# EAGLE board Sch (EAGLE 7.5.0)
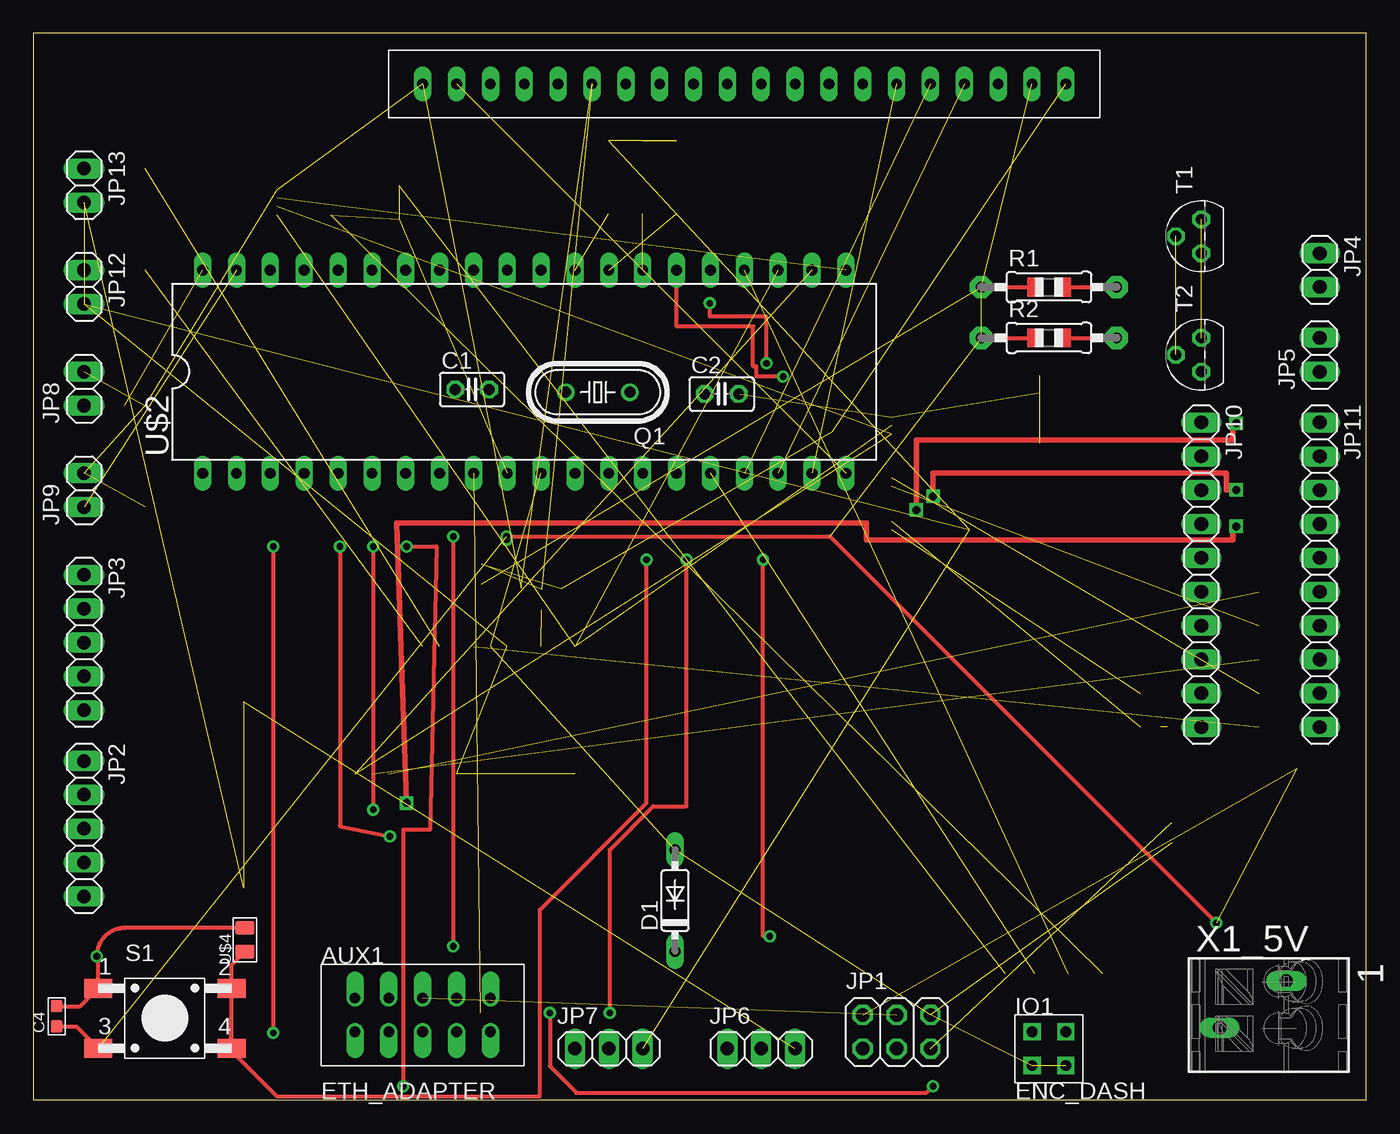
[diagram p0: board, top side]
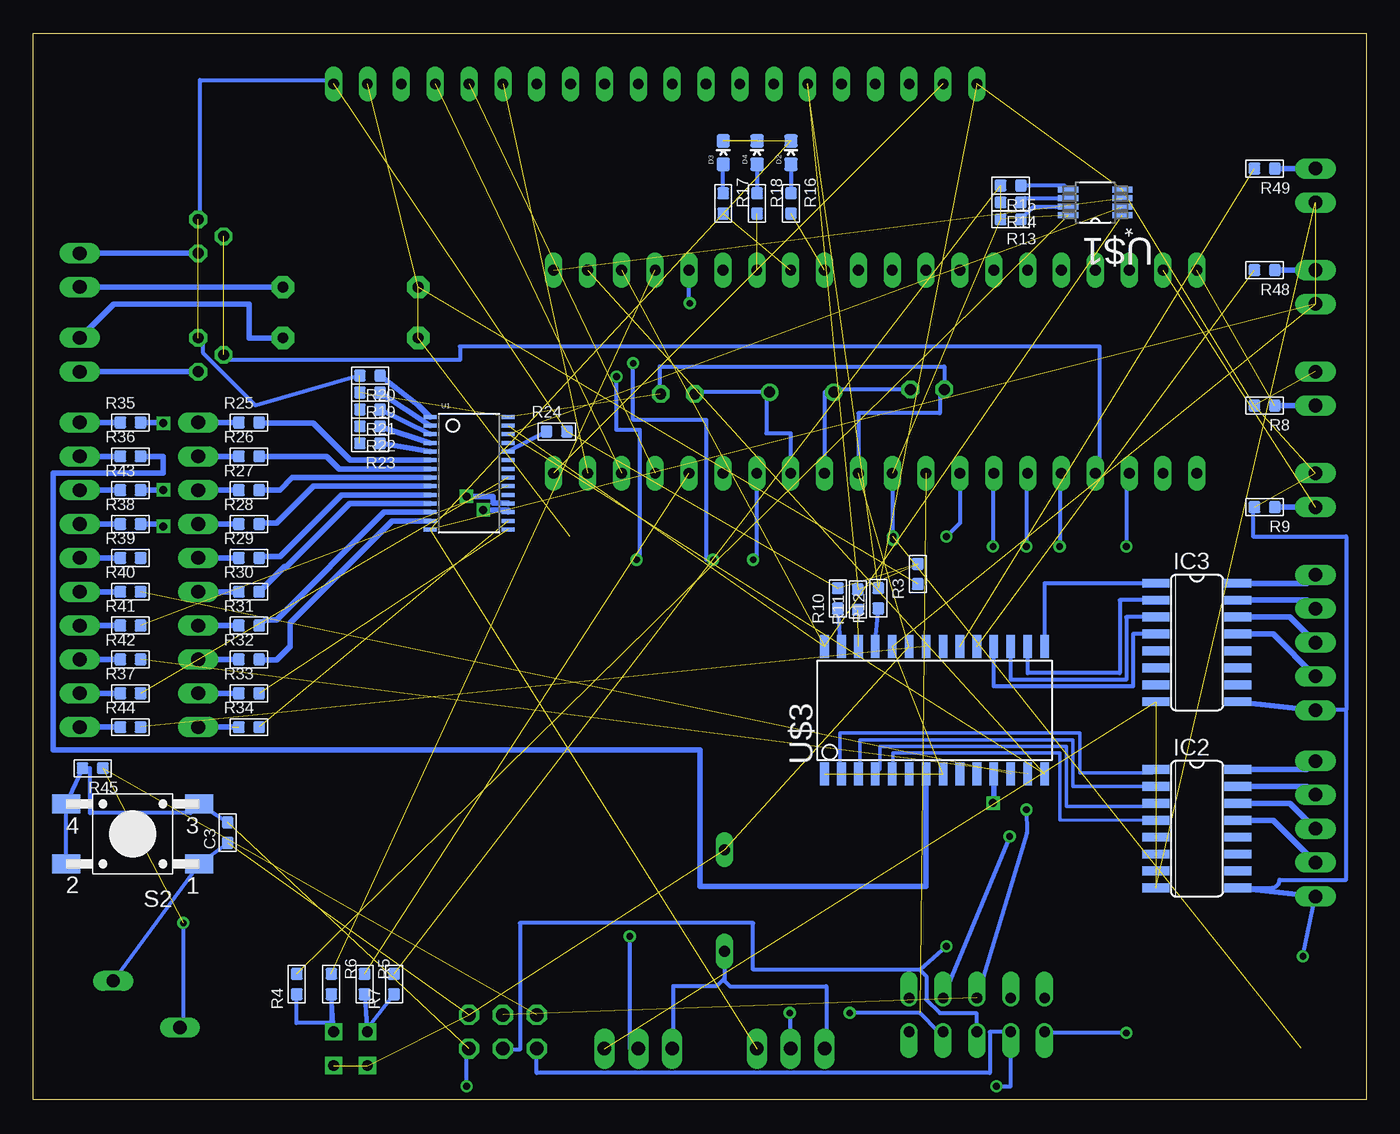
[diagram p1: board, bottom side, seen from below]

Size 100 x 80 mm. Coordinates in mm from the lower left corner, seen from the top.
Outline: 0,0 100,0 100,80 0,80 0,0
Copper layers (1*16): Top 0.035mm / dielectric 1.5mm / Bottom 0.035mm
Design rules "default": minimum track width 10mil, minimum drill 24mil, track to track 8mil, track to pad 8mil, pad to pad 8mil, via to via 8mil, smd to smd 8mil, copper to edge 40mil, drill to drill 8mil, minimum pad ring 10mil, minimum via ring 8mil, stop-mask expansion 4mil, vias tented up to drill 0mil, thermal gap 10mil

## Footprints (pad centres in the part's own frame; a part is rotated, then mirrored left to right if it is on the bottom)
PINHEAD5X5 = drill 0.8 offset: 1 -5.08,0; 2 -2.54,0; 3 0,0; 4 2.54,0; 5 5.08,0; 6 -5.08,-2.54; 7 -2.54,-2.54; 8 0,-2.54; 9 2.54,-2.54; 10 5.08,-2.54
C025-025X050 = drill 0.813 octagon: 1 -1.27,0; 2 1.27,0
C0603 = smd 0.889 x 0.889: 1 0,0.762; 2 0,-0.762
DO35-7 = drill 0.813 long: A 3.81,0; C -3.81,0
LED-0603 = smd 1 x 1: A 0,-0.877; C 0,0.877
SO16 = smd 0.66 x 2.032: 1 -4.445,-3.073; 2 -3.175,-3.073; 3 -1.905,-3.073; 4 -0.635,-3.073; 5 0.635,-3.073; 6 1.905,-3.073; 7 3.175,-3.073; 8 4.445,-3.073; 9 4.445,3.073; 10 3.175,3.073; 11 1.905,3.073; 12 0.635,3.073; 13 -0.635,3.073; 14 -1.905,3.073; 15 -3.175,3.073; 16 -4.445,3.073
PINHEAD2X2 = drill 0.8 square: P$1 -2.54,0; P$2 0,0; P$3 0,-2.54; P$4 -2.54,-2.54
2X03 = drill 1.016 octagon: 1 -2.54,-1.27; 2 -2.54,1.27; 3 0,-1.27; 4 0,1.27; 5 2.54,-1.27; 6 2.54,1.27
1X05 = drill 1.016 long: 1 -5.08,0; 2 -2.54,0; 3 0,0; 4 2.54,0; 5 5.08,0
1X02 = drill 1.016 long: 1 -1.27,0; 2 1.27,0
1X03 = drill 1.016 long: 1 -2.54,0; 2 0,0; 3 2.54,0
1X10 = drill 1.016 long: 1 -11.43,0; 2 -8.89,0; 3 -6.35,0; 4 -3.81,0; 5 -1.27,0; 6 1.27,0; 7 3.81,0; 8 6.35,0; 9 8.89,0; 10 11.43,0
PINHEAD1X20 = drill 0.8 long: P$1 25.4,0; P$2 22.86,0; P$3 20.32,0; P$4 17.78,0; P$5 15.24,0; P$6 12.7,0; P$7 10.16,0; P$8 7.62,0; P$9 5.08,0; P$10 2.54,0; P$11 0,0; P$12 -2.54,0; P$13 -5.08,0; P$14 -7.62,0; P$15 -10.16,0; P$16 -12.7,0; P$17 -15.24,0; P$18 -17.78,0; P$19 -20.32,0; P$20 -22.86,0
HC49/S = drill 0.813: 1 -2.413,0; 2 2.413,0
0805-THM = drill 0.813 pad 1.676 octagon: 1 -5.08,0; 2 5.08,0
R0603 = smd 0.889 x 0.889: 1 0,0.762; 2 0,-0.762
TASTER-9314_SMD = smd 2.1 x 1.4: 1 -5,2.25; 2 5,2.25; 3 -5,-2.25; 4 5,-2.25
TO92 = drill 0.813 octagon: 1 1.27,0; 2 0,1.905; 3 -1.27,0
TSSOP28 = smd 0.305 x 0.991: 1 -4.225,-2.918; 2 -3.575,-2.918; 3 -2.925,-2.918; 4 -2.275,-2.918; 5 -1.625,-2.918; 6 -0.975,-2.918; 7 -0.325,-2.918; 8 0.325,-2.918; 9 0.975,-2.918; 10 1.625,-2.918; 11 2.275,-2.918; 12 2.925,-2.918; 13 3.575,-2.918; 14 4.225,-2.918; 15 4.225,2.918; 16 3.575,2.918; 17 2.925,2.918; 18 2.275,2.918; 19 1.625,2.918; 20 0.975,2.918; 21 0.325,2.918; 22 -0.325,2.918; 23 -0.975,2.918; 24 -1.625,2.918; 25 -2.275,2.918; 26 -2.925,2.918; 27 -3.575,2.918; 28 -4.225,2.918
SOP65P490X110-8N = smd 1.524 x 0.457: 1 -2.032,0.965; 2 -2.032,0.33; 3 -2.032,-0.33; 4 -2.032,-0.965; 5 2.032,-0.965; 6 2.032,-0.33; 7 2.032,0.33; 8 2.032,0.965
DIL40 = drill 0.813 long: 1 -24.13,-7.62; 2 -21.59,-7.62; 3 -19.05,-7.62; 4 -16.51,-7.62; 5 -13.97,-7.62; 6 -11.43,-7.62; 7 -8.89,-7.62; 8 -6.35,-7.62; 9 -3.81,-7.62; 10 -1.27,-7.62; 11 1.27,-7.62; 12 3.81,-7.62; 13 6.35,-7.62; 14 8.89,-7.62; 15 11.43,-7.62; 16 13.97,-7.62; 17 16.51,-7.62; 18 19.05,-7.62; 19 21.59,-7.62; 20 24.13,-7.62; 21 24.13,7.62; 22 21.59,7.62; 23 19.05,7.62; 24 16.51,7.62; 25 13.97,7.62; 26 11.43,7.62; 27 8.89,7.62; 28 6.35,7.62; 29 3.81,7.62; 30 1.27,7.62; 31 -1.27,7.62; 32 -3.81,7.62; 33 -6.35,7.62; 34 -8.89,7.62; 35 -11.43,7.62; 36 -13.97,7.62; 37 -16.51,7.62; 38 -19.05,7.62; 39 -21.59,7.62; 40 -24.13,7.62
SO28W = smd 0.65 x 1.7: 1 -8.89,-4.78; 2 -7.62,-4.78; 3 -6.35,-4.78; 4 -5.08,-4.78; 5 -3.81,-4.78; 6 -2.54,-4.78; 7 -1.27,-4.78; 8 0,-4.78; 9 1.27,-4.78; 10 2.54,-4.78; 11 3.81,-4.78; 12 5.08,-4.78; 13 6.35,-4.78; 14 7.62,-4.78; 15 7.62,4.78; 16 6.35,4.78; 17 5.08,4.78; 18 3.81,4.78; 19 2.54,4.78; 20 1.27,4.78; 21 0,4.78; 22 -1.27,4.78; 23 -2.54,4.78; 24 -3.81,4.78; 25 -5.08,4.78; 26 -6.35,4.78; 27 -7.62,4.78; 28 -8.89,4.78
R0805 = smd 1.397 x 1.016: 1 0,0.889; 2 0,-0.889
P-250-202 = drill 1 long: L1 1.3,2.55; L2 -3.7,-0.95

## Placement (x,y rotation side)
AUX1  ETH_ADAPTER  [PINHEAD5X5]  29.21,7.62 0 top
C1  22pf  [C025-025X050]  32.92,53.28 0 top
C2  22pf  [C025-025X050]  51.65,52.94 0 top
C3  10nf  [C0603]  85.42,20.03 180 bottom
C4  10nf  [C0603]  1.75,6.25 180 top
D1  1N4148DO35-7  [DO35-7]  48.15,14.93 90 top
D2  RED  [LED-0603]  43.16,71.05 0 bottom
D3  GREEN  [LED-0603]  48.24,71.05 0 bottom
D4  ORANGE  [LED-0603]  45.7,71.05 0 bottom
IC2  ULN2003AD  [SO16]  12.7,20.32 270 bottom
IC3  ULN2003AD  [SO16]  12.7,34.29 270 bottom
IO1  ENC_DASH  [PINHEAD2X2]  77.47,5.08 0 top
JP1  ISP  [2X03]  64.77,5.08 0 top
JP2  Stepper1  [1X05]  3.81,20.32 270 top
JP3  Stepper2  [1X05]  3.81,34.29 270 top
JP4  DiscLight1  [1X02]  96.52,62.23 270 top
JP5  Disclight2  [1X02]  96.52,55.88 90 top
JP6  LB1  [1X03]  54.61,3.81 0 top
JP7  LB2  [1X03]  43.18,3.81 0 top
JP8  outsideTemp  [1X02]  3.81,53.34 90 top
JP9  Photocell  [1X02]  3.81,45.72 90 top
JP10  ledbar_power  [1X10]  87.63,39.37 270 top
JP11  ledbar_steering  [1X10]  96.52,39.37 270 top
JP12  indicator_right  [1X02]  3.81,60.96 270 top
JP13  indicator_left  [1X02]  3.81,68.58 270 top
LCD1  LCD12864  [PINHEAD1X20]  52.07,76.2 0 top
Q1  16MHz  [HC49/S]  42.35,53.07 180 top
R1  180  [0805-THM]  76.2,60.96 0 top
R2  180  [0805-THM]  76.2,57.15 0 top
R3  4.7K  [R0603]  33.64,39.43 0 bottom
R4  10K  [R0603]  80.23,8.66 0 bottom
R5  10K  [R0603]  75.15,8.66 180 bottom
R6  10K  [R0603]  77.64,8.67 180 bottom
R7  10K  [R0603]  72.94,8.66 0 bottom
R8  10K  [R0603]  7.62,52.07 90 bottom
R9  10K  [R0603]  7.62,44.45 90 bottom
R10  0R  [R0603]  39.64,37.6 0 bottom
R11  0R  [R0603]  38.14,37.51 0 bottom
R12  0R  [R0603]  36.6,37.61 0 bottom
R13  0R  [R0603]  26.67,66.04 90 bottom
R14  0R  [R0603]  26.67,67.31 90 bottom
R15  0R  [R0603]  26.67,68.58 90 bottom
R16  150R  [R0603]  43.16,67.24 180 bottom
R17  91R  [R0603]  48.24,67.24 180 bottom
R18  160R  [R0603]  45.7,67.24 180 bottom
R19  0R  [R0603]  74.74,53.05 90 bottom
R20  0R  [R0603]  74.74,54.32 90 bottom
R21  0R  [R0603]  74.74,51.78 90 bottom
R22  0R  [R0603]  74.74,50.51 90 bottom
R23  0R  [R0603]  74.74,49.24 90 bottom
R24  0R  [R0603]  60.73,50.13 270 bottom
R25  180R  [R0603]  83.82,50.8 270 bottom
R26  180R  [R0603]  83.82,48.26 270 bottom
R27  180R  [R0603]  83.82,45.72 270 bottom
R28  180R  [R0603]  83.82,43.18 270 bottom
R29  180R  [R0603]  83.82,40.64 270 bottom
R30  180R  [R0603]  83.82,38.1 270 bottom
R31  180R  [R0603]  83.82,35.56 270 bottom
R32  180R  [R0603]  83.82,33.02 270 bottom
R33  180R  [R0603]  83.82,30.48 270 bottom
R34  180R  [R0603]  83.82,27.94 270 bottom
R35  180R  [R0603]  92.71,50.8 270 bottom
R36  180R  [R0603]  92.71,48.26 270 bottom
R37  180R  [R0603]  92.71,30.48 270 bottom
R38  180R  [R0603]  92.71,43.18 270 bottom
R39  180R  [R0603]  92.71,40.64 270 bottom
R40  180R  [R0603]  92.71,38.1 270 bottom
R41  180R  [R0603]  92.71,35.56 270 bottom
R42  180R  [R0603]  92.71,33.02 270 bottom
R43  180R  [R0603]  92.71,45.72 270 bottom
R44  180R  [R0603]  92.71,27.94 270 bottom
R45  10K  [R0603]  95.55,24.86 90 bottom
R48  180R  [R0603]  7.62,62.23 90 bottom
R49  180R  [R0603]  7.62,69.85 90 bottom
S1  menubutton  [TASTER-9314_SMD]  9.87,6.1 0 top
S2  RESET  [TASTER-9314_SMD]  92.54,19.93 180 bottom
T1  BC337  [TO92]  87.63,64.77 90 top
T2  BC337  [TO92]  87.63,55.88 90 top
U1  [TSSOP28]  67.31,46.99 270 bottom
U$1  MCP9808-E/MS  [SOP65P490X110-8N]  20.32,67.31 180 bottom
U$2  ARDUINO_1284P  [DIL40]  36.83,54.61 0 top
U$3  MCP23016  [SO28W]  31.75,29.21 0 bottom
U$4  10K  [R0805]  15.87,11.99 180 top
X1_5V  250-202  [P-250-202]  92.71,6.35 0 top

## Library data of the parts
AUX1 IO1 LCD1 U$2 U$3 = Btz
C1 C2 = rcl
C3 C4 = Seeed-Capacitor-2016; MPN: CC0603KRX7R9BB103
D1 = diode
D2-D4 = SparkFun-LED; PROD_ID: DIO-00819
IC2 IC3 = uln-udn
JP1-JP13 = pinhead
Q1 = crystal; OC_FARNELL: 1667008; OC_NEWARK: unknown
R1 R2 U1 = adafruit
R3 = Seeed-Resistor-2016; MPN: RC0603JR-074K7L
R4-R9 R45 = Seeed-Resistor-2016; MPN: RC0603FR-0710KL
R10-R44 = Seeed-Resistor-2016; MPN: RC0603JR-070RL
R48 R49 = Seeed-Resistor-2016; MPN: RC0603JR-07100RL
S1 S2 = Ergaenzung
T1 T2 = transistor
U$1 = mcp9808; MPN: MCP9808-E/MS; OC_FARNELL: 2080523; OC_NEWARK: 89T8871; PACKAGE: MSOP-8; SUPPLIER: MICROCHIP
U$4 = Seeed-Resistor-2016; MPN: RC0805FR-0710KL
X1_5V = con-wago_250

## Nets
AVCC: U$2.30
DISCLIGHT1: T1.2 T2.2 U$2.4
GND: U$2.31
N$1: IC2.16 JP2.1
N$2: IC2.15 JP2.2
N$3: IC2.14 JP2.3
N$4: IC2.13 JP2.4
N$5: IC3.16 JP3.1
N$6: IC3.15 JP3.2
N$7: IC3.14 JP3.3
N$8: IC3.13 JP3.4
N$10: R36.1 U$3.7
N$11: JP5.1 T2.3
N$12: JP5.2 R2.2
N$13: JP4.2 R1.2
N$14: JP4.1 T1.3
N$15: S1.2 S1.4 U$2.14 U$4.1
N$16: IC3.1 U$3.15
N$17: C2.1 Q1.1 U$2.13
N$18: IC3.2 U$3.16
N$19: C1.2 Q1.2 U$2.12
N$20: IC3.3 U$3.17
N$21: D1.C JP6.1 JP7.1
N$22: R11.2 U$3.26
N$23: AUX1.7 JP1.1 U$2.7
N$24: AUX1.8 JP1.3 U$2.8
N$25: IC3.4 U$3.18
N$26: AUX1.3 JP1.4 U$2.6
N$27: R38.1 U$3.11
N$28: U$1.3 U$2.21
N$29: IO1.P$2 R4.2 R6.1
N$30: AUX1.6 U$2.3
N$31: AUX1.4 U$2.5
N$32: U1.26 U$1.2 U$2.22 U$3.14
N$33: U1.27 U$1.1 U$2.23 U$3.28
N$34: IO1.P$1 R5.1 R7.2
N$35: IC2.1 U$3.2
N$36: IC2.2 U$3.3
N$37: LCD1.P$4 U$2.18
N$38: LCD1.P$5 U$2.17
N$39: LCD1.P$6 U$2.19
N$40: LCD1.P$19 U$2.20
N$41: R5.2 U$2.16
N$42: R6.2 U$2.24
N$43: IC2.3 U$3.4
N$44: IC2.4 U$3.5
N$45: R14.2 U$1.6
N$46: JP7.2 U$2.25
N$47: JP6.2 U$2.26
N$48: JP8.1 R8.2 U$2.40
N$49: R10.2 U$3.27
N$50: JP9.1 R9.2 U$2.39
N$51: R41.1 U1.20
N$52: R12.2 U$3.25
N$53: R13.2 U$1.7
N$54: R15.2 U$1.5
N$55: U1.19
N$56: D2.A R16.2
N$57: D3.A R17.2
N$58: D4.A R18.2
N$59: R18.1 U$2.27
N$60: R17.1 U$2.28
N$61: R16.1 U$2.29
N$62: R24.2 U1.24
N$63: R23.2 U1.5
N$64: R22.2 U1.4
N$65: R21.2 U1.3
N$66: R19.2 U1.2
N$67: R20.2 U1.1
N$68: JP10.1 R25.2
N$69: JP10.2 R26.2
N$70: JP10.3 R27.2
N$71: JP10.4 R28.2
N$72: JP10.5 R29.2
N$73: JP10.6 R30.2
N$74: JP10.7 R31.2
N$75: JP10.8 R32.2
N$76: JP10.9 R33.2
N$77: JP10.10 R34.2
N$78: JP11.1 R35.2
N$79: JP11.2 R36.2
N$80: JP11.3 R43.2
N$81: JP11.4 R38.2
N$82: JP11.5 R39.2
N$83: JP11.6 R40.2
N$84: JP11.7 R41.2
N$85: JP11.8 R42.2
N$86: JP11.9 R37.2
N$87: JP11.10 R44.2
N$88: R25.1 U1.6
N$89: R26.1 U1.7
N$90: R27.1 U1.8
N$91: R28.1 U1.9
N$92: R29.1 U1.10
N$93: R30.1 U1.11
N$94: R31.1 U1.12
N$95: R32.1 U1.13
N$96: R33.1 U1.15
N$97: R34.1 U1.16
N$98: R35.1 U1.17
N$99: R43.1 U1.18
N$102: R37.1 U1.21
N$103: R40.1 U$3.12
N$104: C4.1 JP1.2 LCD1.P$2 R1.1 R2.1 R3.2 R4.1 R7.1 R13.1 R14.1 R15.1 R45.2 S1.3 U$1.8 U$2.10 X1_5V.L2
N$105: AUX1.9 C3.2 JP1.5 R45.1 S2.2 S2.3 S2.4 U$2.9
N$106: R42.1 U$3.13
N$107: R44.1 U$3.22
N$108: R48.1 U$3.19
N$109: R49.1 U$3.20
N$110: JP12.1 R48.2
N$111: JP13.1 R49.2
N$112: D2.C D3.C D4.C IC2.8 IC3.8 JP6.3 JP7.3 JP12.2 JP13.2 U1.14 U$3.1 U$3.8 U$3.24
P$3_GND: C1.1 C2.2 C3.1 C4.2 D1.A IC2.9 IC3.9 IO1.P$3 IO1.P$4 JP1.6 JP2.5 JP3.5 JP8.2 JP9.2 LCD1.P$1 LCD1.P$15 LCD1.P$20 R3.1 R8.1 R9.1 R10.1 R11.1 R12.1 R19.1 R20.1 R21.1 R22.1 R23.1 R24.1 S1.1 S2.1 T1.1 T2.1 U1.28 U$1.4 U$2.11 U$3.23 U$4.2 X1_5V.L1
VCC: AUX1.5

## Tracks (layer width: path | path; a pad name or v marks a point on that pad's centre or on a via)
DISCLIGHT1  (1 unrouted)
  Bottom 0.305: U$2.4 20,46.99 20,56.5 68,56.5 68,55.5 85.72,55.5 T2.2
N$1
  Bottom 0.406: JP2.1 4.45,24.77 IC2.16
N$2
  Bottom 0.406: JP2.2 4.45,23.5 IC2.15
N$3
  Bottom 0.406: JP2.3 5.71,22.23 IC2.14
N$4
  Bottom 0.406: JP2.4 6.99,20.95 IC2.13
N$5
  Bottom 0.406: JP3.1 4.45,38.73 IC3.16
N$6
  Bottom 0.406: JP3.2 4.45,37.47 IC3.15
N$7
  Bottom 0.406: JP3.3 5.71,36.2 IC3.14
N$8
  Bottom 0.406: JP3.4 6.99,34.92 IC3.13
N$10
  Bottom 0.406: R36.1 90.25,48.26 90.25,47 98.5,47 98.5,26.25 50,26.25 50,16 33.02,16 U$3.7
N$11
  Bottom 0.406: T2.3 JP5.1
N$12
  Bottom 0.406: JP5.2 93.98,59.69 83.82,59.69 83.82,57.15 R2.2
N$13
  Bottom 0.406: JP4.2 R1.2
N$14
  Bottom 0.406: JP4.1 T1.3
N$15  (via drill 0.5)
  Top 0.305: S1.4 S1.2 | S1.2 14.87,10.1 U$4.1 | S1.2 14.75,3.75 18.25,0.25 38,0.25 38,14.25 46,22.25 v46,40.5
  Bottom 0.305: v46,40.5 45.72,40.78 U$2.14
N$16
  Bottom 0.305: IC3.1 24.13,38.73 U$3.15
N$17
  Bottom 0.305: C2.1 50.38,53.07 Q1.1 45,53.07 45,50 43.18,50 U$2.13
N$18
  Bottom 0.305: IC3.2 18.5,37.47 18.5,32 25.4,32 U$3.16
N$19
  Bottom 0.305: C1.2 39.94,53.28 Q1.2 40.64,53.07 U$2.12
N$20
  Bottom 0.305: IC3.3 18,36.2 18,31.5 26.67,31.5 U$3.17
N$21
  Bottom 0.305: JP7.1 40.5,3.95 40.5,8.5 47.75,8.5 48.15,8.9 D1.C 48.15,9.1 48.75,8.5 52,8.5 52,3.88 JP6.1
N$22  (1 unrouted)
N$23  (via drill 0.5)
  Top 0.305: v28,41.5 30.25,41.5 29.75,20.25 27.75,20.25 v27.75,1
  Bottom 0.305: U$2.7 28,46.99 v28,41.5 | v27.75,1 26.67,1 AUX1.7 28.25,5.08 28.25,2 62.23,2 JP1.1
N$24  (via drill 0.5)
  Top 0.305: v31.5,42.25 v31.5,11.5
  Bottom 0.305: U$2.8 30.48,43.27 v31.5,42.25 | v31.5,11.5 33.5,9.75 | 33.5,9.75 33,9.25 33,7.5 32,6.5 29.25,6.5 29.25,5.12 AUX1.8 | 33.5,9.75 46,9.75 46,13.25 63.5,13.25 63.5,3.75 64.77,3.75 JP1.3
N$25
  Bottom 0.305: IC3.4 17.5,34.92 17.5,31 27.94,31 U$3.18
N$26  (via drill 0.5)  (1 unrouted)
  Top 0.305: v25.5,41.5 v25.5,21.75
  Bottom 0.305: U$2.6 25.5,46.99 v25.5,41.5 | v25.5,21.75 25.46,20 AUX1.3
N$27  (via drill 0.6)
  Top 0.406: v90.25,43 90,43 90,42 62.5,42 62.5,43.25 27.25,43.25 v28,22.25
  Bottom 0.406: R38.1 90.25,43.18 v90.25,43 | v28,22.25 27.94,22.25 U$3.11
N$28  (1 unrouted)
N$29
  Bottom 0.305: IO1.P$2 R6.1 77.64,5 77.5,5 77.5,5.75 80.25,5.75 80.25,7.9 R4.2
N$30  (via drill 0.5)
  Top 0.305: v18,41.5 v18,5
  Bottom 0.305: U$2.3 18,46.99 v18,41.5 | v18,5 24.13,5 AUX1.6
N$31  (via drill 0.5)
  Top 0.305: v23,41.5 23,20.5 v26.75,19.75
  Bottom 0.305: U$2.5 23,46.99 v23,41.5 | v26.75,19.75 AUX1.4
N$32  (3 unrouted)
N$33  (3 unrouted)
N$34
  Bottom 0.305: IO1.P$1 R5.1 75,5.25 R7.2
N$35
  Bottom 0.254: U$3.2 39.5,24.43 39.5,27.5 21.5,27.5 21.5,24.5 16.04,24.5 IC2.1
N$36
  Bottom 0.254: U$3.3 38,24.43 38,27 22,27 22,23.5 IC2.2
N$37  (1 unrouted)
N$38  (1 unrouted)
N$39  (1 unrouted)
N$40  (1 unrouted)
N$41  (1 unrouted)
N$42  (1 unrouted)
N$43
  Bottom 0.254: U$3.4 36.5,24.76 36.5,26.5 22.5,26.5 22.5,22 15.77,22 IC2.3
N$44
  Bottom 0.254: U$3.5 35.5,26 23,26 23,21 IC2.4
N$45
  Bottom 0.305: R14.2 25.58,67.64 U$1.6
N$46  (via drill 0.5)
  Top 0.305: v43.25,6.5 43.25,18.75 46.5,22 49,22 v49,40.5 | v55,55.25 55,58.75 50.75,58.75 v50.75,59.75
  Bottom 0.305: JP7.2 43.18,6.43 v43.25,6.5 | v49,40.5 49.5,40.5 49.5,51 55,51 v55,55.25 | v50.75,59.75 50.8,59.75 U$2.25
N$47  (via drill 0.5)
  Top 0.305: v55.25,12.25 54.75,12.25 v54.75,40.5 | v56.25,54.25 54.25,54.25 54.25,55 54,55 54,58 48.26,58 U$2.26
  Bottom 0.305: JP6.2 55.25,3.81 v55.25,12.25 | v54.75,40.5 54.5,40.5 54.5,50.25 56.25,50.25 v56.25,54.25
N$48  (1 unrouted)
  Bottom 0.406: JP8.1 R8.2
N$49
  Bottom 0.305: U$3.27 39.39,33.99 R10.2
N$50  (1 unrouted)
  Bottom 0.406: JP9.1 R9.2
N$51  (1 unrouted)
N$52
  Bottom 0.305: U$3.25 36.85,33.99 R12.2
N$53
  Bottom 0.305: R13.2 24.97,66.98 U$1.7
N$54
  Bottom 0.305: U$1.5 22.66,68.58 R15.2
N$56
  Bottom 0.305: D2.A R16.2
N$57
  Bottom 0.305: R17.2 D3.A
N$58
  Bottom 0.305: D4.A R18.2
N$59  (1 unrouted)
N$60  (1 unrouted)
N$61  (1 unrouted)
N$62
  Bottom 0.305: R24.2 U1.24
N$63
  Bottom 0.406: R23.2 U1.5
N$64
  Bottom 0.406: R22.2 U1.4
N$65
  Bottom 0.406: U1.3 R21.2
N$66
  Bottom 0.406: U1.2 R19.2
N$67
  Bottom 0.406: U1.1 71.08,52.07 R20.2
N$68
  Bottom 0.406: JP10.1 R25.2
N$69
  Bottom 0.406: JP10.2 R26.2
N$70
  Bottom 0.406: JP10.3 R27.2
N$71
  Bottom 0.406: JP10.4 R28.2
N$72
  Bottom 0.406: JP10.5 R29.2
N$73
  Bottom 0.406: JP10.6 R30.2
N$74
  Bottom 0.406: JP10.7 R31.2
N$75
  Bottom 0.406: JP10.8 R32.2
N$76
  Bottom 0.406: JP10.9 R33.2
N$77  (1 unrouted)
  Bottom 0.406: JP10.10 85.09,27.94
N$78
  Bottom 0.406: R35.2 JP11.1
N$79
  Bottom 0.406: R36.2 JP11.2
N$80
  Bottom 0.406: R43.2 JP11.3
N$81
  Bottom 0.406: R38.2 JP11.4
N$82
  Bottom 0.406: R39.2 JP11.5
N$83
  Bottom 0.406: R40.2 JP11.6
N$84
  Bottom 0.406: R41.2 JP11.7
N$85
  Bottom 0.406: R42.2 JP11.8
N$86
  Bottom 0.406: R37.2 JP11.9
N$87
  Bottom 0.406: R44.2 JP11.10
N$88
  Bottom 0.406: U1.6 76.22,47.97 79,50.75 83.01,50.75 R25.1
N$89
  Bottom 0.406: U1.7 77.06,47.31 78,48.25 83.05,48.25 R26.1
N$90
  Bottom 0.406: U1.8 80.58,46.66 81.5,45.75 83.03,45.75 R27.1
N$91
  Bottom 0.406: U1.9 78.98,46.02 81.75,43.25 82.99,43.25 R28.1
N$92
  Bottom 0.406: U1.10 76.89,45.37 81.5,40.75 82.95,40.75 R29.1
N$93
  Bottom 0.406: U1.11 76.28,44.72 81,40 81.16,40 R30.1
N$94
  Bottom 0.406: U1.12 73.69,44.06 81.75,36 82.62,36 R31.1
N$95
  Bottom 0.406: U1.13 73.08,43.41 80.75,35.75 80.75,34 81.75,33 83.04,33 R32.1
N$96  (1 unrouted)
N$97  (1 unrouted)
N$98  (via drill 0.6)
  Top 0.406: v90.25,50.75 90,50.75 90,49.5 66.25,49.5 v66.25,44.25
  Bottom 0.406: R35.1 90.25,50.8 v90.25,50.75 | v66.25,44.25 64.39,44.25 U1.17
N$99  (via drill 0.6)
  Top 0.406: v90.25,45.75 89.5,45.75 89.5,47 67.5,47 v67.5,45.25
  Bottom 0.406: R43.1 90.25,45.72 v90.25,45.75 | v67.5,45.25 65.5,45.25 65.5,44.75 64.39,44.75 U1.18
N$100  (via drill 0.5)
  other vias: 35.5,42
N$102  (1 unrouted)
N$103  (1 unrouted)
N$104  (via drill 0.5)  (13 unrouted)
  Top 0.305: v35.5,42.25 59.75,42.25 v88.75,13.25 | C4.1 3.23,5.49 S1.3
  Bottom 0.305: U$2.10 35.56,42.31 v35.5,42.25 | v88.75,13.25 88.75,5.66 X1_5V.L2
N$105  (via drill 0.5)  (2 unrouted)
  Top 0.305: v38.75,6.5 38.75,2.5 40.75,0.5 67,0.5 v67.5,1
  Bottom 0.305: AUX1.9 32.08,5.08 33.5,6.5 v38.75,6.5 | v67.5,1 67.5,3.62 JP1.5 | S2.2 S2.4 R45.1 95.75,24.86 95.75,21.5 88.22,21.5 S2.3 C3.2
N$106  (1 unrouted)
N$107  (1 unrouted)
N$108  (1 unrouted)
N$109  (1 unrouted)
N$110
  Bottom 0.406: JP12.1 R48.2
N$111
  Bottom 0.406: JP13.1 R49.2
N$112  (12 unrouted)
P$3_GND  (via drill 0.5)  (25 unrouted)
  Top 0.305: C4.2 3.53,7.01 S1.1 4.87,10.63 v4.75,10.75 arc-90 6.88,12.88 U$4.2
  Bottom 0.305: T1.1 87.5,66.04 87.5,76.5 77.47,76.5 LCD1.P$1 | U$2.11 38.1,51.5 32,51.5 32,53.28 C1.1 31.65,55 53,55 53,52.94 C2.2 | R20.1 83.32,52.07 87.25,56 87.25,56.77 T2.1 | v4.75,10.75 JP2.5 | IC2.9 7.12,15.88 arc-90 6.5,16.5 1.5,16.5 1.5,29.25 | 1.5,29.25 3.81,29.25 JP3.5 | R9.1 8.5,44.45 8.5,42.25 1.5,42.25 1.5,29.25 | C3.1 S2.1 X1_5V.L1
  Bottom 0.406: JP3.5 IC3.9 | JP2.5 IC2.9